# EAGLE board ZOE-M8Q GPS (EAGLE 9.2.1)
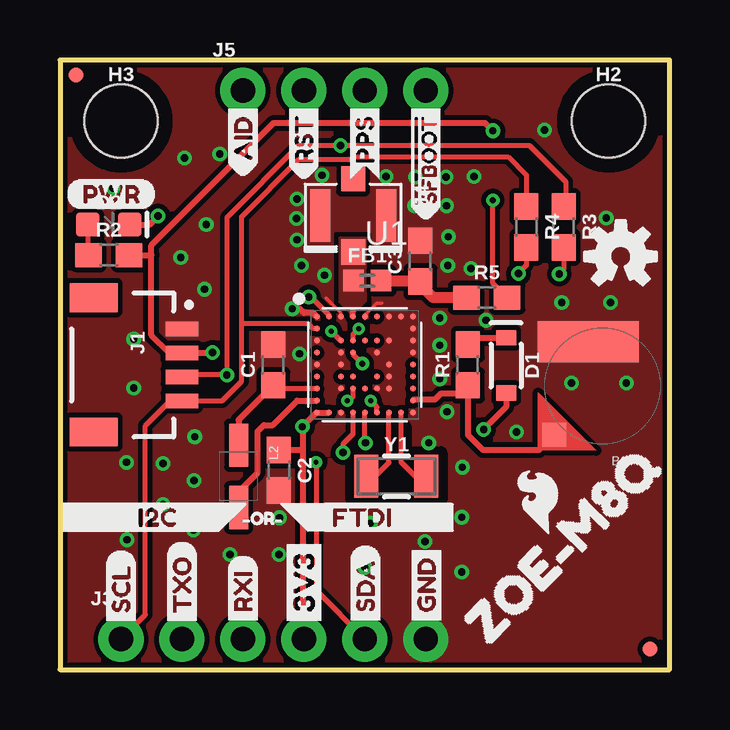
[diagram p0: board, top side]
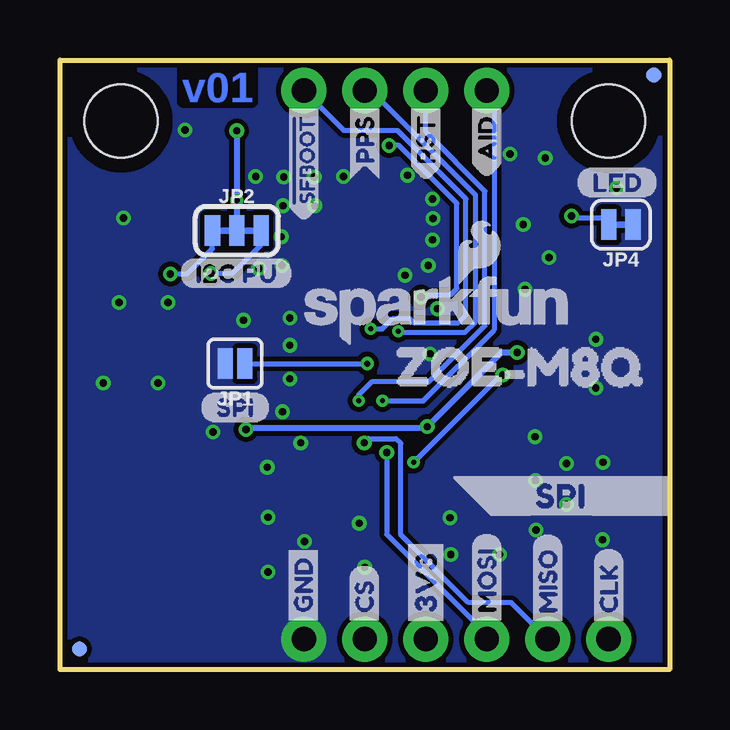
[diagram p1: board, bottom side, seen from below]

Size 25.4 x 25.4 mm. Coordinates in mm from the lower left corner, seen from the top.
Outline: 0,0 25.4,0 25.4,25.4 0,25.4 0,0
Copper layers (1*16): Top 0.035mm / dielectric 1.5mm / Bottom 0.035mm
Design rules "SparkFun-2-layer-TIGHT *": minimum track width 7mil, minimum drill 15mil, track to track 7mil, track to pad 7mil, pad to pad 7mil, via to via 7mil, smd to smd 7mil, copper to edge 7mil, drill to drill 7mil, minimum pad ring 7mil, minimum via ring 6mil, stop-mask expansion 4mil, vias tented up to drill 25mil, thermal gap 10mil
tRestrict: 7 lines

## Footprints (pad centres in the part's own frame; a part is rotated, then mirrored left to right if it is on the bottom)
ML414H_IV01E = smd 1 x 1: + 2.022,2.032 | smd 4.2 x 1.7: - 0.6,-1.85
0603 = smd 1.1 x 1: 1 -0.85,0; 2 0.85,0
SOD-323 = smd 0.63 x 0.83: A 1.15,0; C -1.15,0
LED-0603 = smd 1 x 1: A -0.877,0; C 0.877,0
0402 = smd 0.85 x 0.9: 1 -0.58,0; 2 0.58,0
FIDUCIAL-MICRO = smd 0.635 x 0.635: 1 0,0
STAND-OFF-TIGHT = hole 3.048: 0,0
JST04_1MM_RA = smd 0.6 x 1.35: 1 -1.5,0; 2 -0.5,0; 3 0.5,0; 4 1.5,0 | smd 1.2 x 2: NC1 2.8,-3.675; NC2 -2.8,-3.675
1X06_NO_SILK = drill 1.016 pad 1.88: 1 0,0; 2 2.54,0; 3 5.08,0; 4 7.62,0; 5 10.16,0; 6 12.7,0
U.FL = smd 2.2 x 0.85: 1 0,1.375; 2 0,-1.375 | smd 1.05 x 1: FEED 1.525,0; NC -1.525,0
1X04_NO_SILK = drill 1.016 pad 1.88: 1 0,0; 2 2.54,0; 3 5.08,0; 4 7.62,0
SMT-JUMPER_2_NO_SILK = smd 0.635 x 1.27: 1 -0.406,0; 2 0.406,0
SMT-JUMPER_3_2-NC_TRACE_SILK = smd 0.635 x 1.27: 1 -1.016,0; 2 0,0; 3 1.016,0
SMT-JUMPER_2_NC_TRACE_SILK = smd 0.635 x 1.27: 1 -0.508,0; 2 0.508,0
UNIQUE_0806_NDUC = smd 1.8 x 0.8: 1 -1.3,0; 2 1.3,0
UBLOX_ZOE_M8-0-10 = smd 0.25 x 0.25: 1 -1.996,2.004; 2 -1.496,2.004; 3 -0.996,2.004; 4 -0.496,2.004; 5 0.004,2.004; 6 0.504,2.004; 7 1.004,2.004; 8 1.504,2.004; 9 2.004,2.004; 10 2.004,1.504; 11 2.004,1.004; 12 2.004,0.504; 13 2.004,0.004; 14 2.004,-0.496; 15 2.004,-0.996; 16 2.004,-1.496; 17 2.004,-1.996; 18 1.504,-1.996; 19 1.004,-1.996; 20 0.504,-1.996; 21 0.004,-1.996; 22 -0.496,-1.996; 23 -0.996,-1.996; 24 -1.496,-1.996; 25 -1.996,-1.996; 26 -1.996,-1.496; 27 -1.996,-0.996; 28 -1.996,-0.496; 29 -1.996,0.004; 30 -1.996,0.504; 31 -1.996,1.004; 32 -1.996,1.504; 33 -0.996,1.004; 34 -0.496,1.004; 35 0.004,1.004; 36 0.504,1.004; 37 1.004,1.004; 38 1.004,0.004; 39 1.004,-0.496; 40 1.004,-0.996; 41 0.504,-0.996; 42 0.004,-0.996; 43 -0.496,-0.996; 44 -0.996,-0.996; 45 -0.996,-0.496; 46 -0.996,0.004; 47 -0.996,0.504; 48 -0.496,0.504; 49 0.504,0.504; 50 0.504,-0.496; 51 -0.496,-0.496
CRYSTAL-SMD-3.2X1.5MM = smd 1 x 1.8: P$1 -1.25,0; P$2 1.25,0

## Placement (x,y rotation side)
B1  ML414H_IV01E_BATTERY  [ML414H_IV01E]  22.61,11.81 180 top
C1  4.7uF  [0603]  8.89,12.7 90 top
C2  0.1uF  [0603]  9.12,8.31 270 top
C3  47pF  [0603]  15.01,17.02 90 top
D1  0.5A/40V/420mV  [SOD-323]  18.59,12.67 270 top
D2  RED  [LED-0603]  2.03,18.54 0 top
FB1  FERRITE_BEAD-120_OHM-0402  [0402]  12.8,16.21 0 top
FD1  FIDUCIALUFIDUCIAL  [FIDUCIAL-MICRO]  0.66,24.77 0 top
FD2  FIDUCIALUFIDUCIAL  [FIDUCIAL-MICRO]  24.59,0.86 0 bottom
FD3  FIDUCIALUFIDUCIAL  [FIDUCIAL-MICRO]  0.66,24.77 0 bottom
FD4  FIDUCIALUFIDUCIAL  [FIDUCIAL-MICRO]  24.59,0.86 0 top
FRAME1  FRAME-LEDGER  [CREATIVE_COMMONS]  -7.62,-12.7 0 top  (outside the outline)
H2  STAND-OFFTIGHT  [STAND-OFF-TIGHT]  22.86,22.86 0 top
H3  STAND-OFFTIGHT  [STAND-OFF-TIGHT]  2.54,22.86 0 top
J1  [JST04_1MM_RA]  5.08,12.7 270 top
J3  [1X06_NO_SILK]  2.54,1.27 0 top
J4  U.FL  [U.FL]  12.22,18.92 270 top
J5  [1X04_NO_SILK]  7.62,24.13 0 top
JP1  JUMPER-SMT_2_NO_SILK  [SMT-JUMPER_2_NO_SILK]  18.11,12.75 180 bottom
JP2  JUMPER-SMT_3_2-NC_TRACE_SILK  [SMT-JUMPER_3_2-NC_TRACE_SILK]  18.03,18.29 0 bottom
JP4  JUMPER-SMT_2_NC_TRACE_SILK  [SMT-JUMPER_2_NC_TRACE_SILK]  2.03,18.54 180 bottom
L2  2.2UH_SHIELDED_INDUCTOR  [UNIQUE_0806_NDUC]  7.44,8.05 270 top
LOGO1  SFE_LOGO_NAME_FLAME.1_INCH  [SFE_LOGO_NAME_FLAME_.1]  9.65,14.99 0 bottom
LOGO2  OSHW-LOGOS  [OSHW-LOGO-S]  23.36,17.21 0 top
LOGO3  SFE_LOGO_FLAME.1_INCH  [SFE_LOGO_FLAME_.1]  20.03,7.16 45 top
R1  100  [0603]  16.99,12.7 90 top
R2  1k  [0603]  2.03,17.27 0 top
R3  2.2k  [0603]  20.98,18.44 270 top
R4  2.2k  [0603]  19.43,18.44 270 top
R5  10  [0603]  17.78,15.49 0 top
U1  UBLOX_ZOE_M8-0-10  [UBLOX_ZOE_M8-0-10]  12.7,12.7 0 top
U$1  [3V3-03]  10.16,1.57 90 top
U$2  [SDA0]  12.73,1.7 90 top
U$3  [SCL0]  2.54,1.68 90 top
U$4  [GND0]  15.27,1.7 90 top
U$5  [CS0]  12.73,1.68 90 bottom
U$6  [MISO0]  5.08,1.65 90 bottom
U$7  [GND0]  15.27,1.7 90 bottom
U$8  [CLK0]  2.54,1.68 90 bottom
U$9  [SPI0]  6.49,7.24 0 bottom
U$10  [3V3-03]  10.16,1.57 90 bottom
U$11  [AID0]  7.62,20.52 90 bottom
U$12  [RST0]  10.16,20.37 90 bottom
U$13  [PPS0]  12.7,20.4 90 bottom
U$14  [#SFBOOT0]  15.24,18.59 90 top
U$15  [TXO0]  5.08,1.65 90 top
U$16  [ZOE#M8Q0]  12.75,12.62 0 bottom
U$17  [SPI0]  19.56,10.92 0 bottom
U$18  [I2C_PU0]  20.45,16.51 0 bottom
U$19  [RXI0]  7.62,1.7 90 top
U$20  [ZOE#M8Q0]  16.35,0.6 45 top
U$21  [AID0]  7.62,20.52 90 top
U$22  [RST0]  10.16,20.37 90 top
U$23  [PPS0]  12.7,20.4 90 top
U$24  [#SFBOOT0]  15.24,18.59 90 bottom
U$25  [LED0]  3.91,20.29 0 bottom
U$26  [PWR-()-03]  0.25,19.81 0 top
U$27  [MOSI0]  7.62,1.68 90 bottom
U$28  [I2C0]  2.54,6.35 0 top
U$29  [FTDI0]  10.64,6.35 0 top
U$30  [#OR#0]  7.16,6.3 0 top
Y1  32.768kHz  [CRYSTAL-SMD-3.2X1.5MM]  14.02,8.05 0 top

## Library data of the parts
B1 = SparkFun-Batteries; PROD_ID: BATT-14267
C1 = SparkFun-Capacitors; PROD_ID: CAP-08280
C2 = SparkFun-Capacitors; PROD_ID: CAP-00810
C3 = SparkFun-Capacitors; PROD_ID: CAP-08913
D1 = SparkFun-DiscreteSemi; PROD_ID: DIO-10955
D2 = SparkFun-LED; PROD_ID: DIO-00819
FB1 = SparkFun-Coils; MFG_PART: BLM15HB121SN1D; PROD_ID: NDUC-14206
FD1-FD4 FRAME1 LOGO1-LOGO3 = SparkFun-Aesthetics
H2 H3 = SparkFun-Hardware
J1 = SparkFun-Connectors; PROD_ID: CONN-13694
J3 = SparkFun-Connectors
J4 = SparkFun-Connectors; PROD_ID: CONN-09193; SF_ID: WRL-09144
J5 = SparkFun-Connectors; PROD_ID: CONN-09696
JP1 JP2 JP4 = SparkFun-Jumpers
L2 = SparkFun-Coils; PROD_ID: NDUC-14257
R1 = SparkFun-Resistors; PROD_ID: RES-07863
R2 = SparkFun-Resistors; PROD_ID: RES-07856
R3 R4 = SparkFun-Resistors; PROD_ID: RES-08272
R5 = SparkFun-Resistors; PROD_ID: RES-12581
U1 = SparkFun-GPS; PROD_ID: IC-14251
U$1 U$10 U$26 = Labels
U$2 = SDA
U$3 = SCL
U$4 U$7 = GND
U$5 = CS
U$6 = MISO
U$8 = CLK
U$9 = SPI_MAJOR
U$11 U$21 = AID
U$12 U$22 = RESET
U$13 U$23 = TIMEPULSE
U$14 U$24 = SAFEBOOT
U$15 = TX
U$16 U$20 = ZOE-M8Q
U$17 = SPI_JUMPER
U$18 = I2C_PU
U$19 = RX
U$25 = LED
U$27 = MOSI
U$28 = I2C_MINOR
U$29 = FTDI_SMALL
U$30 = OR
Y1 = SparkFun-Clocks; PROD_ID: XTAL-13062

## Nets
3.3V: C2.1 D1.A J1.2 J3.4 JP2.2 R2.2 R5.2 U1.24 U1.25
ANT: FB1.1 J4.FEED U1.4
D_SEL: JP1.1 U1.48
GND: B1.- C1.2 C2.2 C3.2 J1.1 J3.6 J4.1 J4.2 JP1.2 JP4.1 U1.1 U1.3 U1.5 U1.7 U1.8 U1.9 U1.10 U1.11 U1.12 U1.17 U1.23 U1.29 U1.31 U1.37 U1.38 U1.39 U1.40 U1.41 U1.44 U1.46 U1.47 U1.49
INT: J5.1 U1.43
N$1: JP2.1 R3.2
N$2: D1.C R1.2
N$3: JP2.3 R4.2
N$4: D2.A R2.1
N$6: C1.1 L2.1 U1.27
N$7: L2.2 U1.26
N$8: D2.C JP4.2
N$9: C3.1 FB1.2 R5.1
N$13: U1.18 Y1.P$2
N$15: U1.19 Y1.P$1
RESET: J5.2 U1.20
RXI/MOSI: J3.3 U1.22
SAFEBOOT: J5.4 U1.34
SCL/CLK: J1.4 J3.1 R4.1 U1.32
SDA/CS: J1.3 J3.5 R3.1 U1.2
TIMEPULSE: J5.3 U1.33
TXO/MISO: J3.2 U1.21
V_BATT: B1.+ R1.1 U1.16

## Tracks (layer width: path | path; a pad name or v marks a point on that pad's centre or on a via)
3.3V  (via drill 0.25, 0.3)
  Top 0.152: v10.1,10.12 v10.11,10.11
  Top 0.203: R5.2 18.03,16.09 v18.03,19.56
  Top 0.254: U1.24 U1.25 10.68,10.7 v10.1,10.12 | v6.35,13.21 J1.2 4.55,13.2 3.81,13.94 3.81,17.27 | D1.A 18.59,10.95 v17.65,10.01 | v18.03,22.45 17.7,22.78 8.91,22.78 3.81,17.68 3.81,17.27 | R2.2 3.81,17.27 | J3.4 10.11,1.32 10.11,9.14 | v10.11,10.11 10.11,9.14 | 10.11,9.14 9.13,9.14 C2.1
  Bottom 0.254: v6.35,13.21 7.01,13.21 v10.1,10.12 10.16,10.06 17.6,10.06 v17.65,10.01 | v18.03,22.45 v18.03,19.56 JP2.2
ANT
  Top 0.254: U1.4 12.2,14.95
  pour Top (isolate 0.152, no thermals): 11.68,17.14 11.68,15.29 12.09,14.88 12.24,14.88 12.73,15.37 12.73,17.98 11.71,17.98 11.68,17.98
D_SEL  (via drill 0.25)
  Top 0.203: U1.48 12.2,13.14 v12.6,12.75
  Bottom 0.203: JP1.1 v12.6,12.75
GND  (via drill 0.3)
  Top 0.152: U1.5 12.7,14.76 13.21,15.27 13.41,15.27 | U1.3 11.7,14.86 11.1,15.47
  Top 0.203: U1.5 12.7,14.68
  Top 0.254: U1.1 10.55,14.86 10.16,14.86 9.98,15.04 v9.68,15.04
  other vias: 22.94,15.29 20.19,22.48 4.29,6.88 12.93,6.1 12.7,4.27 6.1,18.54 5.18,21.31 22.76,18.82 2.77,8.64 15.37,9.45 5.61,9.7 11.02,16.43 9.88,17.91 9.88,19.61 10.92,20.6 13.59,20.55 14.78,19.33 16.1,19.33 16.08,20.52 14.81,20.52 10.06,16.84 9.86,18.8 17.25,20.55 16.18,18.03 16.15,16.84 17.12,16.71 5.59,7.87 4.29,8.59 5.03,17.17 6.02,15.85 6.65,21.49 2.21,20.07 16.76,8.43 3.07,11.73 2.79,5.41 15.82,13.51 15.82,12.12 15.82,14.66 9.98,13.16 9.14,6.32 9.12,4.8 5.56,5.82 15.21,5.33 16.74,6.35 21.31,11.94 23.6,11.94 16.74,4.06 3.07,13.77 7.09,4.8 16.13,10.74 20.9,15.29 19.02,9.91 17.75,14.55
  pour Top (isolate 0.203, rank 4, no thermals): 0,25.4 0,0 25.4,0 25.4,25.4
  pour Bottom (isolate 0.203, rank 4, no thermals): 0,25.4 0,0 25.4,0 25.4,25.4
INT  (via drill 0.2)
  Top 0.203: U1.43 12.2,11.37 12.04,11.2 v11.96,11.2
  Bottom 0.203: v11.96,11.2 10.26,11.2 7.32,14.15 7.32,23.82 J5.1
N$1  (via drill 0.3)
  Top 0.203: R3.2 20.98,16.66 v20.8,16.48
  Bottom 0.203: v20.8,16.48 20.09,16.48 19.05,17.53 JP2.1
N$2
  Top 0.254: D1.C 18.57,13.8 17.25,13.8 R1.2
N$3  (via drill 0.3)
  Top 0.203: R4.2 19.43,16.84 v19.1,16.51
  Bottom 0.203: v19.1,16.51 18.21,16.51 17.02,17.7 JP2.3
N$4
  Top 0.203: D2.A 1.16,17.3 R2.1
N$6
  Top 0.203: C1.1 9.08,11.66 9.12,11.7 U1.27
  Top 0.254: 8.75,11.85 C1.1 7.44,10.4 L2.1
N$7
  Top 0.254: U1.26 9.88,11.2 8.87,10.19 8.49,10.19 8.23,9.93 8.23,8.2 7.44,7.42 L2.2
N$8  (via drill 0.3)
  Top 0.254: D2.C 3.73,18.54 v4.09,18.9
  Bottom 0.203: v4.09,18.9 3.99,18.8 2.79,18.8 JP4.2
N$9
  Top 0.457: FB1.2 14.83,16.2 15.01,16.03 | 15.01,16.03 C3.1 | R5.1 15.54,15.49 15.01,16.03
N$13
  Top 0.203: Y1.P$2 14.81,8.05 14.2,8.66 U1.18
N$15
  Top 0.203: Y1.P$1 13.13,8.05 13.7,8.62 U1.19
RESET  (via drill 0.2)
  Top 0.203: U1.20 13.2,10.95 v12.95,11.2
  Bottom 0.203: v12.95,11.2 12.95,11.46 12.42,11.99 10.03,11.99 7.7,14.33 7.7,19.94 10.16,22.4 J5.2
RXI/MOSI  (via drill 0.3)
  Top 0.203: U1.22 12.2,9.82 11.79,9.4 v11.79,9.04
  Bottom 0.203: v11.79,9.04 11.79,5.64 7.62,1.47 J3.3
SAFEBOOT  (via drill 0.2)
  Top 0.203: v12.45,14.2 12.2,13.96 U1.34
  Bottom 0.203: J5.4 13.56,22.45 11.33,22.45 8.48,19.61 8.48,14.76 8.79,14.45 10.67,14.45 10.85,14.63 11.53,14.63 11.96,14.2 v12.45,14.2
SCL/CLK
  Top 0.203: 7.57,14.35 7.57,12.01 6.75,11.2 J1.4 4.6,11.2 3.56,10.16 3.56,2.29 J3.1 | 7.57,14.35 7.57,18.87 9.96,21.26 12.14,21.26 12.24,21.36 18.67,21.36 19.43,20.6 R4.1 | U1.32 10.56,14.2 10.36,14.4 7.62,14.4 7.57,14.35
SDA/CS  (via drill 0.2, 0.3)
  Top 0.203: J1.3 5.16,12.28 v6.95,12.28 v6.96,12.28 6.96,18.85 9.96,21.84 v11.68,21.84 19.56,21.84 21.08,20.32 21.08,19.39 R3.1 | U1.2 11.2,14.78 10.46,15.52 v10.36,15.52 | v10.67,8.64 10.67,3.3 J3.5
  Bottom 0.203: 6.98,12.3 7,12.3 v10.67,8.64 | v10.36,15.52 10.26,15.62 9.12,15.62 8.87,15.88 8.87,19.43 11.28,21.84 v11.68,21.84
  Bottom 0.254: 6.98,12.3 v6.95,12.28
TIMEPULSE  (via drill 0.2)
  Top 0.203: U1.33 v11.31,14.1 v11.3,14.1
  Bottom 0.203: v11.3,14.1 11.25,14.05 8.53,14.05 8.08,14.5 8.08,19.76 12.45,24.13 J5.3
TXO/MISO  (via drill 0.3)
  Top 0.203: v12.72,9.45 12.7,9.47 U1.21
  Bottom 0.203: v12.72,9.45 12.55,9.63 11.4,9.63 11.2,9.42 11.2,5.61 8.38,2.79 6.6,2.79 J3.2
V_BATT
  Top 0.254: U1.16 14.76,11.26 15.63,11.26 15.89,11.51 16.99,11.51 | R1.1 16.99,11.51 | 16.99,11.51 16.99,9.78 17.63,9.14 19.95,9.14 B1.+

## Text on the board
Bottom: v01
Measures: Units in Inches
tDocu: Elias Santistevan